# Altium PCB PCB2.PcbDoc (part 1 of 3)
Units mil, origin at the board's own origin, x right, y up, seen from the top; angles counter-clockwise.
Board outline 7874.02 x 7874.02 mil, 2 copper layers (Top Layer, Bottom Layer); 456 components, 298 nets, 1240 pads, 257 vias.
Unrouted connection lines stored in the file: 581.
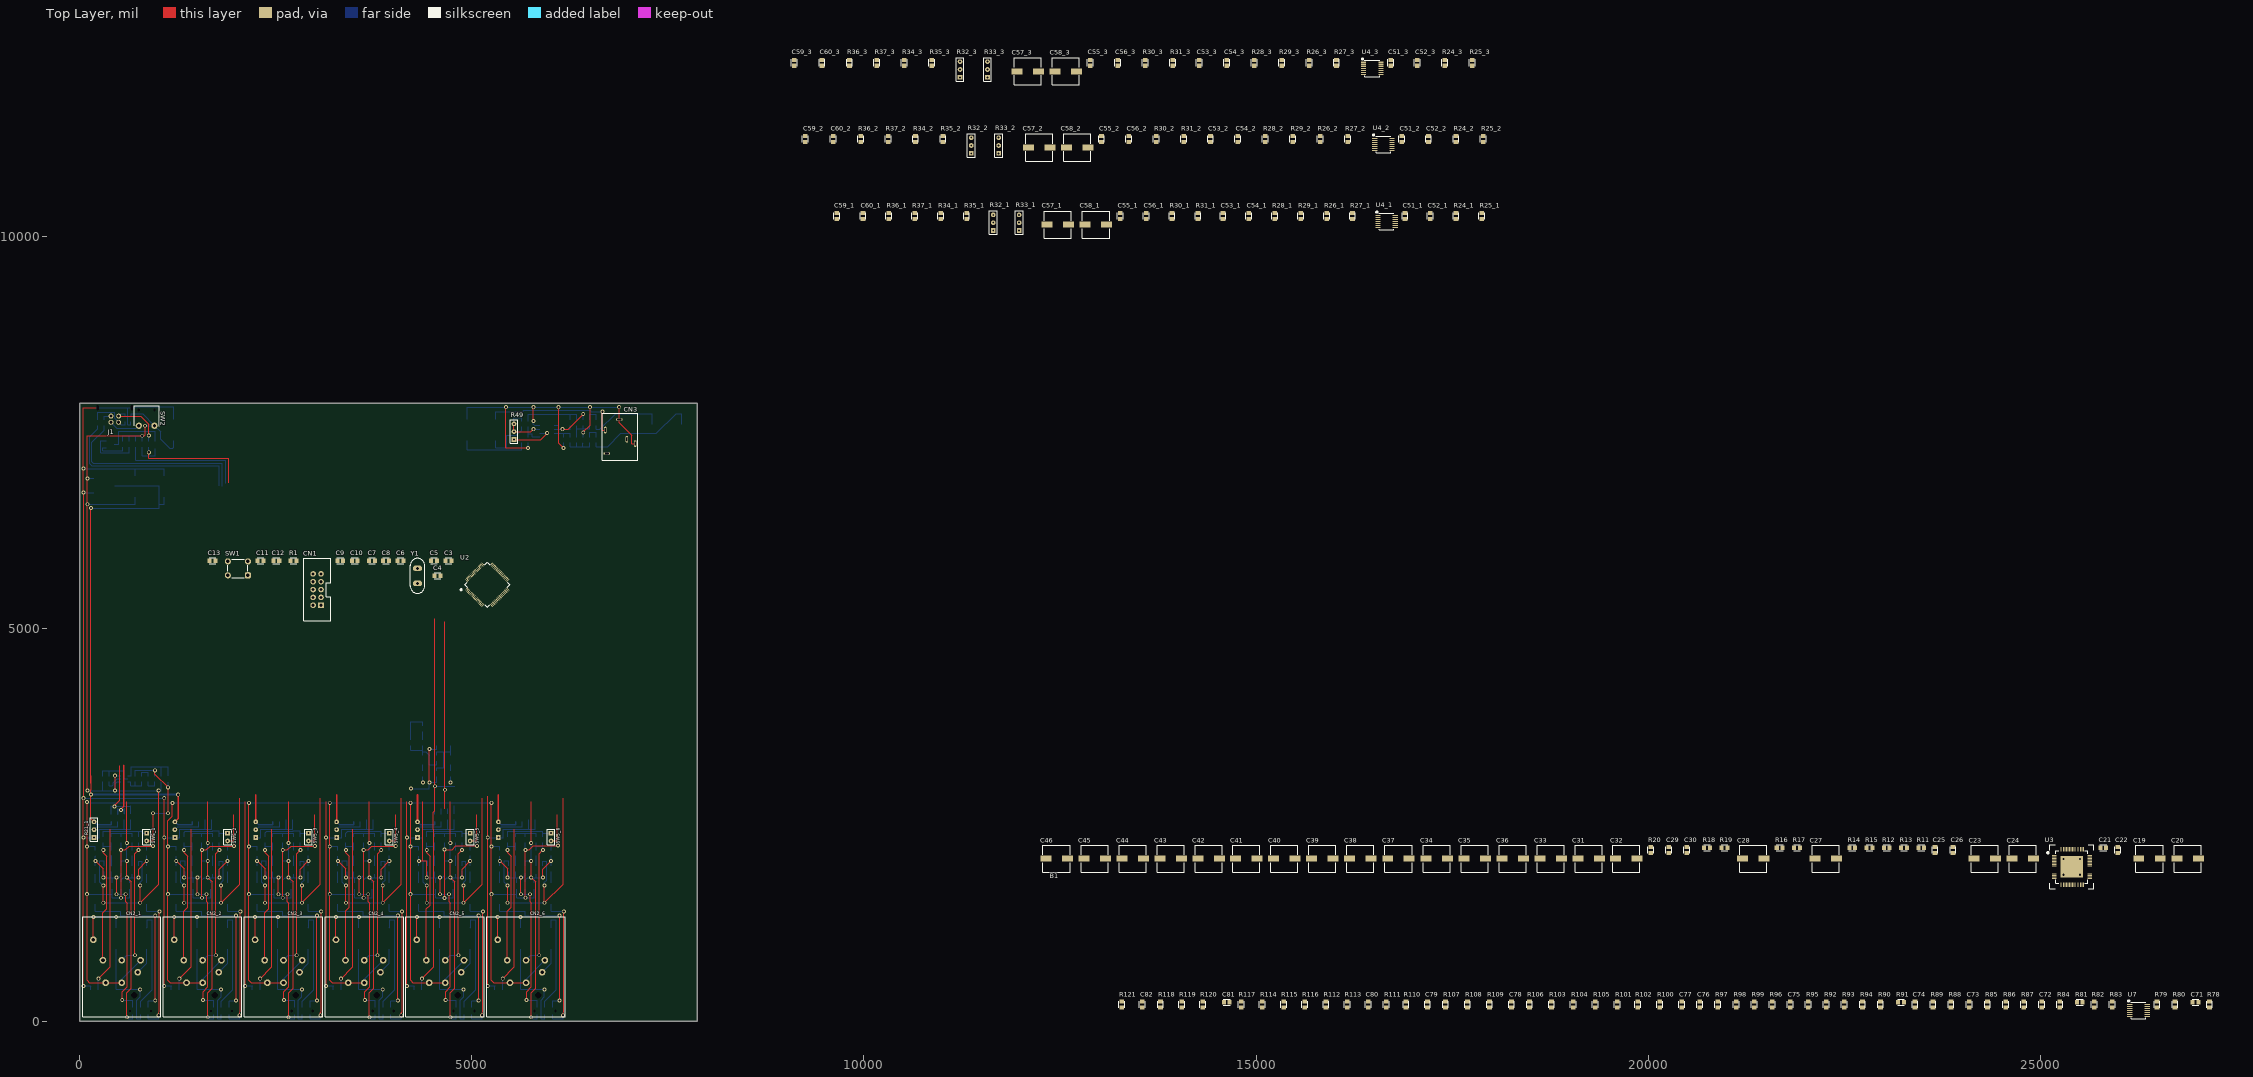
[diagram p0: Top Layer view]
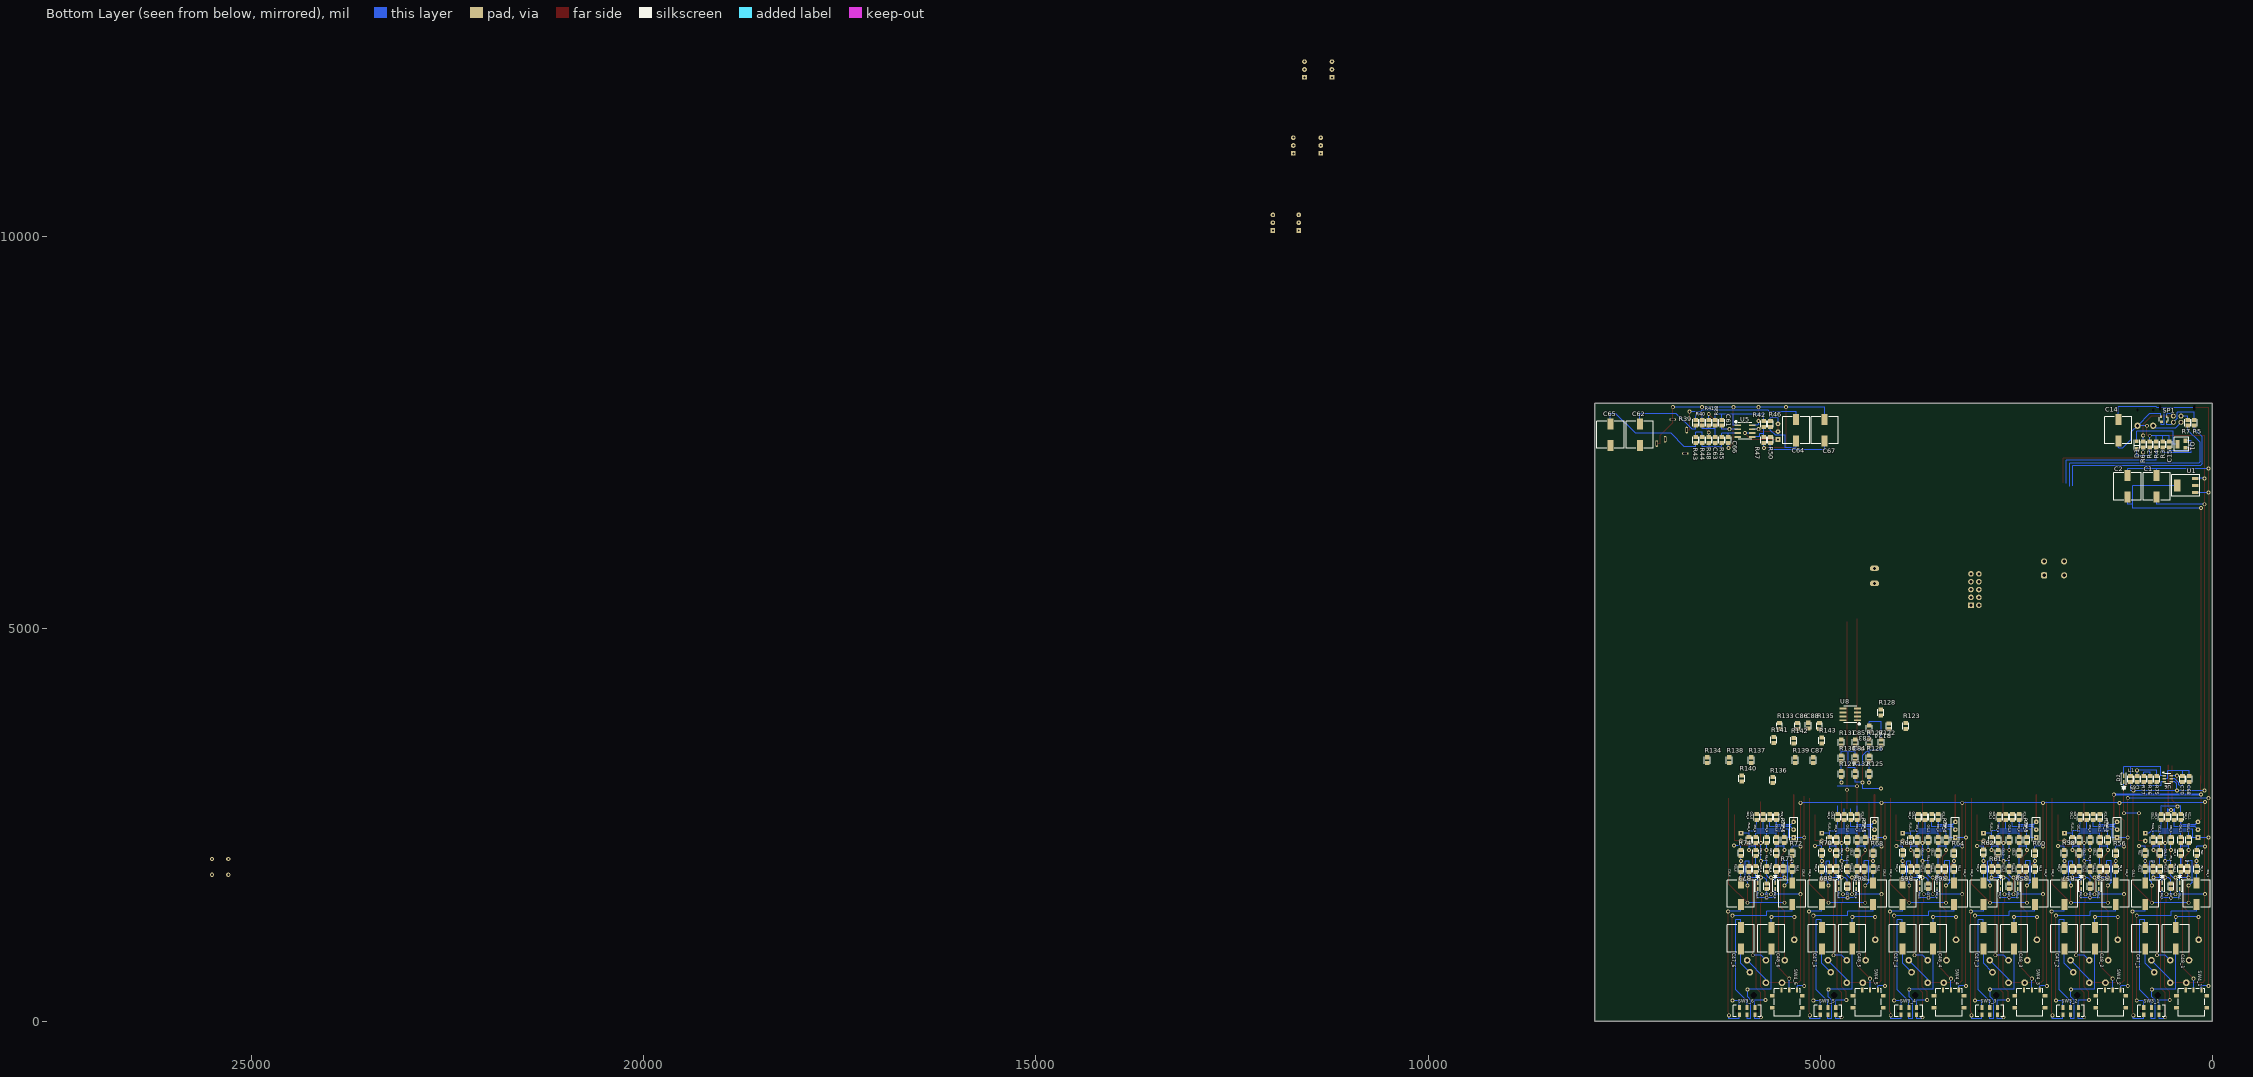
[diagram p1: Bottom Layer view, seen from below]

## Layer stack, top to bottom
Top Solder: solder mask 0.4, Solder Resist, Dk 3.5
Top Layer: signal copper 1.4
Dielectric 1: dielectric 12.6, FR-4, Dk 4.8
Bottom Layer: signal copper 1.4
Bottom Solder: solder mask 0.4, Solder Resist, Dk 3.5

## Board outline
0,0 0,7874.02 7874.02,7874.02 7874.02,0

## Design rules (kind name [scope] priority, off if disabled: settings)
Clearance [All] p1: gap=10 ignorepadtopadclearanceinfootprint=TRUE except(0: Arc-Hole Track-Hole SMDPad-Hole THPad-Hole Via-Hole Fill-Hole Poly-Hole Region-Hole Text-Hole)
PolygonConnect [All] p1: connectstyle=Relief reliefconductorwidth=10 reliefentries=4 polygonreliefangle="90 Angle" airgapwidth=10
RoomDefinition U_phantom_power_enabler_3 [InComponentClass('U_phantom_power_enabler_3')] p1: confinementstyle=ConfineIn formatcopy=TRUE lockcomponents=FALSE outline 2315.45,1636.32 3115.16,1636.32 3115.16,2689.47 2315.45,2689.47
RoomDefinition U_phantom_power_enabler_2 [InComponentClass('U_phantom_power_enabler_2')] p2: confinementstyle=ConfineIn formatcopy=TRUE lockcomponents=FALSE outline 1284.45,1636.32 2084.15,1636.32 2084.15,2689.47 1284.45,2689.47
RoomDefinition U_input_output_2 [InComponentClass('U_input_output_2')] p3: confinementstyle=ConfineIn formatcopy=TRUE lockcomponents=FALSE outline 1060.53,19.68 2084.15,19.68 2084.15,2677.17 1060.53,2677.17
RoomDefinition U_phantom_power_enabler_6 [InComponentClass('U_phantom_power_enabler_6')] p4: confinementstyle=ConfineIn formatcopy=TRUE lockcomponents=FALSE outline 5408.46,1636.32 6208.17,1636.32 6208.17,2689.47 5408.46,2689.47
RoomDefinition U_phantom_power_enabler_5 [InComponentClass('U_phantom_power_enabler_5')] p5: confinementstyle=ConfineIn formatcopy=TRUE lockcomponents=FALSE outline 4377.46,1636.32 5177.17,1636.32 5177.17,2689.47 4377.46,2689.47
RoomDefinition U_phantom_power_enabler_4 [InComponentClass('U_phantom_power_enabler_4')] p6: confinementstyle=ConfineIn formatcopy=TRUE lockcomponents=FALSE outline 3346.46,1636.32 4146.16,1636.32 4146.16,2689.47 3346.46,2689.47
RoomDefinition U_input_output_6 [InComponentClass('U_input_output_6')] p7: confinementstyle=ConfineIn formatcopy=TRUE lockcomponents=FALSE outline 5184.55,19.68 6208.17,19.68 6208.17,2677.17 5184.55,2677.17
RoomDefinition U_input_output_5 [InComponentClass('U_input_output_5')] p8: confinementstyle=ConfineIn formatcopy=TRUE lockcomponents=FALSE outline 4153.54,19.68 5177.17,19.68 5177.17,2677.17 4153.54,2677.17
RoomDefinition U_input_output_4 [InComponentClass('U_input_output_4')] p9: confinementstyle=ConfineIn formatcopy=TRUE lockcomponents=FALSE outline 3122.54,19.68 4146.16,19.68 4146.16,2677.17 3122.54,2677.17
RoomDefinition U_input_output_3 [InComponentClass('U_input_output_3')] p10: confinementstyle=ConfineIn formatcopy=TRUE lockcomponents=FALSE outline 2091.54,19.68 3115.16,19.68 3115.16,2677.17 2091.54,2677.17
RoomDefinition U_att_17db_6 [InComponentClass('U_att_17db_6')] p11: confinementstyle=ConfineIn formatcopy=TRUE lockcomponents=FALSE outline 5179.63,1407.48 6198.33,1407.48 6198.33,2022.64 5179.63,2022.64
RoomDefinition U_att_17db_5 [InComponentClass('U_att_17db_5')] p12: confinementstyle=ConfineIn formatcopy=TRUE lockcomponents=FALSE outline 4148.62,1407.48 5167.32,1407.48 5167.32,2022.64 4148.62,2022.64
RoomDefinition U_att_17db_4 [InComponentClass('U_att_17db_4')] p13: confinementstyle=ConfineIn formatcopy=TRUE lockcomponents=FALSE outline 3117.62,1407.48 4136.32,1407.48 4136.32,2022.64 3117.62,2022.64
RoomDefinition U_att_17db_3 [InComponentClass('U_att_17db_3')] p14: confinementstyle=ConfineIn formatcopy=TRUE lockcomponents=FALSE outline 2086.61,1407.48 3105.32,1407.48 3105.32,2022.64 2086.61,2022.64
RoomDefinition U_att_17db_2 [InComponentClass('U_att_17db_2')] p15: confinementstyle=ConfineIn formatcopy=TRUE lockcomponents=FALSE outline 1055.61,1407.48 2074.31,1407.48 2074.31,2022.64 1055.61,2022.64
RoomDefinition U_input [InComponentClass('U_input')] p16: confinementstyle=ConfineIn formatcopy=TRUE lockcomponents=FALSE outline 147.64,1441.93 6254.92,1441.93 6254.92,2236.71 147.64,2236.71
RoomDefinition U_usb_2_0 [InComponentClass('U_usb_2_0')] p17: confinementstyle=ConfineIn formatcopy=TRUE lockcomponents=FALSE outline 19.68,7261.32 1377.95,7261.32 1377.95,7854.33 19.68,7854.33
RoomDefinition U_stm32 [InComponentClass('U_stm32')] p18: confinementstyle=ConfineIn formatcopy=TRUE lockcomponents=FALSE outline 1618.56,5091.77 5563.56,5091.77 5563.56,6011.77 1618.56,6011.77
RoomDefinition U_preamp_3 [InComponentClass('U_preamp_3')] p19: confinementstyle=ConfineIn formatcopy=TRUE lockcomponents=FALSE outline 9065.91,11922.52 18025.91,11922.52 18025.91,12402.52 9065.91,12402.52
RoomDefinition U_preamp_2 [InComponentClass('U_preamp_2')] p20: confinementstyle=ConfineIn formatcopy=TRUE lockcomponents=FALSE outline 9208.62,10953.03 18168.62,10953.03 18168.62,11433.03 9208.62,11433.03
RoomDefinition U_preamp_1 [InComponentClass('U_preamp_1')] p21: confinementstyle=ConfineIn formatcopy=TRUE lockcomponents=FALSE outline 9608.94,9968.78 18128.94,9968.78 18128.94,10448.78 9608.94,10448.78
RoomDefinition U_phantom_power_enabler_1 [InComponentClass('U_phantom_power_enabler_1')] p22: confinementstyle=ConfineIn formatcopy=TRUE lockcomponents=FALSE outline 253.44,1636.32 1053.15,1636.32 1053.15,2689.47 253.44,2689.47
RoomDefinition U_phantom_power [InComponentClass('U_phantom_power')] p23: confinementstyle=ConfineIn formatcopy=TRUE lockcomponents=FALSE outline 66.44,2810.57 1390.26,2810.57 1390.26,3294.69 66.44,3294.69
RoomDefinition U_output_jack [InComponentClass('U_output_jack')] p24: confinementstyle=ConfineIn formatcopy=TRUE lockcomponents=FALSE outline 4768.7,7140.75 7854.33,7140.75 7854.33,7854.33 4768.7,7854.33
RoomDefinition U_input_output_1 [InComponentClass('U_input_output_1')] p25: confinementstyle=ConfineIn formatcopy=TRUE lockcomponents=FALSE outline 29.53,19.68 1053.15,19.68 1053.15,2677.17 29.53,2677.17
RoomDefinition U_fuente [InComponentClass('U_fuente')] p26: confinementstyle=ConfineIn formatcopy=TRUE lockcomponents=FALSE outline 155.02,6606.79 1262.3,6606.79 1262.3,7025.1 155.02,7025.1
RoomDefinition U_codec [InComponentClass('U_codec')] p27: confinementstyle=ConfineIn formatcopy=TRUE lockcomponents=FALSE outline 12230.83,1675.61 27100.83,1675.61 27100.83,2355.61 12230.83,2355.61
RoomDefinition U_bal2un_2 [InComponentClass('U_bal2un_2')] p28: confinementstyle=ConfineIn formatcopy=TRUE lockcomponents=FALSE outline 3618.66,2944.39 6719.65,2944.39 6719.65,4303.44 3618.66,4303.44
RoomDefinition U_bal2un_1 [InComponentClass('U_bal2un_1')] p29: confinementstyle=ConfineIn formatcopy=TRUE lockcomponents=FALSE outline 13240.89,22.11 27305.89,22.11 27305.89,387.11 13240.89,387.11
RoomDefinition U_att_17db_1 [InComponentClass('U_att_17db_1')] p30: confinementstyle=ConfineIn formatcopy=TRUE lockcomponents=FALSE outline 24.61,1407.48 1043.31,1407.48 1043.31,2022.64 24.61,2022.64
RoutingVias [All] p1: holewidth=28 width=50 viastyle="Through Hole" minholewidth=28 minwidth=50 maxholewidth=28 maxwidth=50
SolderMaskExpansion [All] p1: expansion=4
UnRoutedNet [All] p1: checkbadconnections=TRUE
Width [All] p1: maxlimit=100 minlimit=5 preferedwidth=10
29 further rules are at their usual default settings.

## Classes and differential pairs
channel class preamp: U_preamp_1 U_preamp_2 U_preamp_3
channel class phantom_power_enabler: U_phantom_power_enabler_1 U_phantom_power_enabler_2 U_phantom_power_enabler_3 U_phantom_power_enabler_4 U_phantom_power_enabler_5 U_phantom_power_enabler_6
channel class input_output: U_input_output_1 U_input_output_2 U_input_output_3 U_input_output_4 U_input_output_5 U_input_output_6
channel class att_17db: U_att_17db_1 U_att_17db_2 U_att_17db_3 U_att_17db_4 U_att_17db_5 U_att_17db_6
component class U_usb_2_0: C14 C15 D1 J1 Q1 R2 R3 R4 R5 R6 R7 SP1 SW2
component class U_stm32: C3 C4 C5 C6 C7 C8 C9 C10 C11 C12 C13 CN1 R1 SW1 U2 Y1
component class U_preamp_3: C51_3 C52_3 C53_3 C54_3 C55_3 C56_3 C57_3 C58_3 C59_3 C60_3 R24_3 R25_3 R26_3 R27_3 R28_3 R29_3 R30_3 R31_3 R32_3 R33_3 R34_3 R35_3 R36_3 R37_3 U4_3
component class U_preamp_2: C51_2 C52_2 C53_2 C54_2 C55_2 C56_2 C57_2 C58_2 C59_2 C60_2 R24_2 R25_2 R26_2 R27_2 R28_2 R29_2 R30_2 R31_2 R32_2 R33_2 R34_2 R35_2 R36_2 R37_2 U4_2
component class U_preamp_1: C51_1 C52_1 C53_1 C54_1 C55_1 C56_1 C57_1 C58_1 C59_1 C60_1 R24_1 R25_1 R26_1 R27_1 R28_1 R29_1 R30_1 R31_1 R32_1 R33_1 R34_1 R35_1 R36_1 R37_1 U4_1
component class U_phantom_power: C68 C69 C70 D2 L1 R75 R76 R77 U6
component class U_phantom_power_enabler_6: C89_6 C90_6 C91_6 C92_6 C93_6 D3_6 D4_6 R144_6 R145_6 R146_6 R147_6 SW5_6
component class U_phantom_power_enabler_5: C89_5 C90_5 C91_5 C92_5 C93_5 D3_5 D4_5 R144_5 R145_5 R146_5 R147_5 SW5_5
component class U_phantom_power_enabler_4: C89_4 C90_4 C91_4 C92_4 C93_4 D3_4 D4_4 R144_4 R145_4 R146_4 R147_4 SW5_4
component class U_phantom_power_enabler_3: C89_3 C90_3 C91_3 C92_3 C93_3 D3_3 D4_3 R144_3 R145_3 R146_3 R147_3 SW5_3
component class U_phantom_power_enabler_2: C89_2 C90_2 C91_2 C92_2 C93_2 D3_2 D4_2 R144_2 R145_2 R146_2 R147_2 SW5_2
component class U_phantom_power_enabler_1: C89_1 C90_1 C91_1 C92_1 C93_1 D3_1 D4_1 R144_1 R145_1 R146_1 R147_1 SW5_1
component class U_output_jack: C61 C62 C63 C64 C65 C66 C67 CN3 R38 R39 R40 R41 R42 R43 R44 R45 R46 R47 R48 R49 R50 U5
component class U_input: R51 R52 R53 R54 R55 R56 R57 R58 R59 R60 R61 R62 R63 R64 R65 R66 R67 R68 R69 R70 R71 R72 R73 R74
component class U_input_output_6: C47_6 C48_6 C49_6 C50_6 CN2_6 R21_6 R22_6 R23_6 SW3_6 SW4_6
component class U_input_output_5: C47_5 C48_5 C49_5 C50_5 CN2_5 R21_5 R22_5 R23_5 SW3_5 SW4_5
component class U_input_output_4: C47_4 C48_4 C49_4 C50_4 CN2_4 R21_4 R22_4 R23_4 SW3_4 SW4_4
component class U_input_output_3: C47_3 C48_3 C49_3 C50_3 CN2_3 R21_3 R22_3 R23_3 SW3_3 SW4_3
component class U_input_output_2: C47_2 C48_2 C49_2 C50_2 CN2_2 R21_2 R22_2 R23_2 SW3_2 SW4_2
component class U_input_output_1: C47_1 C48_1 C49_1 C50_1 CN2_1 R21_1 R22_1 R23_1 SW3_1 SW4_1
component class U_fuente: C1 C2 U1
component class U_codec: B1 C19 C20 C21 C22 C23 C24 C25 C26 C27 C28 C29 C30 C31 C32 C33 C34 C35 C36 C37 C38 C39 C40 C41 C42 C43 C44 C45 C46 R11 R12 R13 R14 R15 R16 R17 R18 R19 R20 U3
component class U_bal2un_2: C83 C84 C85 C86 C87 C88 R122 R123 R124 R125 R126 R127 R128 R129 R130 R131 R132 R133 R134 R135 R136 R137 R138 R139 R140 R141 R142 R143 U8
component class U_bal2un_1: C71 C72 C73 C74 C75 C76 C77 C78 C79 C80 C81 C82 R78 R79 R80 R81 R82 R83 R84 R85 R86 R87 R88 R89 R90 R91 R92 R93 R94 R95 R96 R97 R98 R99 R100 R101 R102 R103 R104 R105 R106 R107 R108 R109 R110 R111 R112 R113 R114 R115 R116 R117 R118 R119 R120 R121 U7
component class U_att_17db_6: C16_6 C17_6 C18_6 R8_6 R9_6 R10_6
component class U_att_17db_5: C16_5 C17_5 C18_5 R8_5 R9_5 R10_5
component class U_att_17db_4: C16_4 C17_4 C18_4 R8_4 R9_4 R10_4
component class U_att_17db_3: C16_3 C17_3 C18_3 R8_3 R9_3 R10_3
component class U_att_17db_2: C16_2 C17_2 C18_2 R8_2 R9_2 R10_2
component class U_att_17db_1: C16_1 C17_1 C18_1 R8_1 R9_1 R10_1

## Components (designator, comment, footprint, x,y, rotation, side; value= is the part's Value field where it differs from the comment)
B1 "GND_BIND" Track_8mil 12365.69,1783.46 r0 top
C1 "Capacitor polarizado" CAP_ELECTROLYTIC 711.12,6815.94 r90 bottom
C2 "Capacitor polarizado" CAP_ELECTROLYTIC 1082.67,6815.94 r90 bottom
C3 "Capacitor" C0805 4703.56,5866.77 r0 top
C4 "Capacitor" C0805 4564.47,5676.67 r0 top
C5 "Capacitor" C0805 4518.56,5866.77 r0 top
C6 "Capacitor" C0805 4093.56,5866.77 r0 top
C7 "Capacitor" C0805 3728.56,5866.77 r0 top
C8 "Capacitor" C0805 3908.56,5866.77 r0 top
C9 "Capacitor" C0805 3323.56,5866.77 r0 top
C10 "Capacitor" C0805 3508.56,5866.77 r0 top
C11 "Capacitor" C0805 2308.56,5866.77 r0 top
C12 "Capacitor" C0805 2508.56,5866.77 r0 top
C13 "Capacitor" C0805 1693.56,5866.77 r0 top
C14 "Capacitor polarizado" CAP_ELECTROLYTIC 1198.33,7534.45 r90 bottom
C15 "Capacitor" C0805 548.72,7352.36 r270 bottom
C16_1 "Capacitor polarizado" CAP_ELECTROLYTIC 201.77,1625.68 r270 bottom (schematic designator C16)
C16_2 "Capacitor polarizado" CAP_Electrolytic 1232.78,1625.68 r270 bottom (schematic designator C16)
C16_3 "Capacitor polarizado" CAP_Electrolytic 2263.78,1625.68 r270 bottom (schematic designator C16)
C16_4 "Capacitor polarizado" CAP_Electrolytic 3294.78,1625.68 r270 bottom (schematic designator C16)
C16_5 "Capacitor polarizado" CAP_Electrolytic 4325.79,1625.68 r270 bottom (schematic designator C16)
C16_6 "Capacitor polarizado" CAP_Electrolytic 5356.79,1625.68 r270 bottom (schematic designator C16)
C17_1 "Capacitor" C0805 529.04,1719.18 r90 bottom (schematic designator C17)
C17_2 "Capacitor" C0805 1560.04,1719.18 r90 bottom (schematic designator C17)
C17_3 "Capacitor" C0805 2591.04,1719.18 r90 bottom (schematic designator C17)
C17_4 "Capacitor" C0805 3622.05,1719.18 r90 bottom (schematic designator C17)
C17_5 "Capacitor" C0805 4653.05,1719.18 r90 bottom (schematic designator C17)
C17_6 "Capacitor" C0805 5684.06,1719.18 r90 bottom (schematic designator C17)
C18_1 "Capacitor polarizado" CAP_ELECTROLYTIC 856.3,1625.68 r270 bottom (schematic designator C18)
C18_2 "Capacitor polarizado" CAP_Electrolytic 1887.3,1625.68 r270 bottom (schematic designator C18)
C18_3 "Capacitor polarizado" CAP_Electrolytic 2918.31,1625.68 r270 bottom (schematic designator C18)
C18_4 "Capacitor polarizado" CAP_Electrolytic 3949.31,1625.68 r270 bottom (schematic designator C18)
C18_5 "Capacitor polarizado" CAP_Electrolytic 4980.31,1625.68 r270 bottom (schematic designator C18)
C18_6 "Capacitor polarizado" CAP_Electrolytic 6011.32,1625.68 r270 bottom (schematic designator C18)
C19 "Capacitor polarizado" CAP_ELECTROLYTIC 26390.83,2070.61 r0 top
C20 "Capacitor polarizado" CAP_ELECTROLYTIC 26875.83,2070.61 r0 top
C21 "Capacitor" C0805 25800.83,2210.61 r0 top
C22 "Capacitor" C0805 25985.83,2180.61 r90 top
C23 "Capacitor polarizado" CAP_ELECTROLYTIC 24290.83,2070.61 r0 top
C24 "Capacitor polarizado" CAP_ELECTROLYTIC 24775.83,2070.61 r0 top
C25 "Capacitor" C0805 23655.83,2180.61 r90 top
C26 "Capacitor" C0805 23885.83,2180.61 r90 top
C27 "Capacitor polarizado" CAP_ELECTROLYTIC 22265.83,2070.61 r0 top
C28 "Capacitor polarizado" CAP_ELECTROLYTIC 21340.83,2070.61 r0 top
C29 "Capacitor" C0805 20260.83,2180.61 r90 top
C30 "Capacitor" C0805 20490.83,2180.61 r90 top
C31 "Capacitor polarizado" CAP_ELECTROLYTIC 19240.83,2070.61 r0 top
C32 "Capacitor polarizado" CAP_ELECTROLYTIC 19720.83,2070.61 r0 top
C33 "Capacitor polarizado" CAP_ELECTROLYTIC 18755.83,2070.61 r0 top
C34 "Capacitor polarizado" CAP_ELECTROLYTIC 17300.83,2070.61 r0 top
C35 "Capacitor polarizado" CAP_ELECTROLYTIC 17785.83,2070.61 r0 top
C36 "Capacitor polarizado" CAP_ELECTROLYTIC 18270.83,2070.61 r0 top
C37 "Capacitor polarizado" CAP_ELECTROLYTIC 16815.83,2070.61 r0 top
C38 "Capacitor polarizado" CAP_ELECTROLYTIC 16330.83,2070.61 r0 top
C39 "Capacitor polarizado" CAP_ELECTROLYTIC 15845.83,2070.61 r0 top
C40 "Capacitor polarizado" CAP_ELECTROLYTIC 15360.83,2070.61 r0 top
C41 "Capacitor polarizado" CAP_ELECTROLYTIC 14875.83,2070.61 r0 top
C42 "Capacitor polarizado" CAP_ELECTROLYTIC 14395.83,2070.61 r0 top
C43 "Capacitor polarizado" CAP_ELECTROLYTIC 13910.83,2070.61 r0 top
C44 "Capacitor polarizado" CAP_ELECTROLYTIC 13425.83,2070.61 r0 top
C45 "Capacitor polarizado" CAP_ELECTROLYTIC 12940.83,2070.61 r0 top
C46 "Capacitor polarizado" CAP_ELECTROLYTIC 12455.83,2070.61 r0 top
C47_1 "Capacitor polarizado" CAP_ELECTROLYTIC 856.3,1053.15 r270 bottom (schematic designator C47)
C47_2 "Capacitor polarizado" CAP_Electrolytic 1887.3,1053.15 r270 bottom (schematic designator C47)
C47_3 "Capacitor polarizado" CAP_Electrolytic 2918.31,1053.15 r270 bottom (schematic designator C47)
C47_4 "Capacitor polarizado" CAP_Electrolytic 3949.31,1053.15 r270 bottom (schematic designator C47)
C47_5 "Capacitor polarizado" CAP_Electrolytic 4980.31,1053.15 r270 bottom (schematic designator C47)
C47_6 "Capacitor polarizado" CAP_Electrolytic 6011.32,1053.15 r270 bottom (schematic designator C47)
C48_1 "Capacitor polarizado" CAP_ELECTROLYTIC 467.52,1053.15 r90 bottom (schematic designator C48)
C48_2 "Capacitor polarizado" CAP_Electrolytic 1498.52,1053.15 r90 bottom (schematic designator C48)
C48_3 "Capacitor polarizado" CAP_Electrolytic 2529.53,1053.15 r90 bottom (schematic designator C48)
C48_4 "Capacitor polarizado" CAP_Electrolytic 3560.53,1053.15 r90 bottom (schematic designator C48)
C48_5 "Capacitor polarizado" CAP_Electrolytic 4591.54,1053.15 r90 bottom (schematic designator C48)
C48_6 "Capacitor polarizado" CAP_Electrolytic 5622.54,1053.15 r90 bottom (schematic designator C48)
C49_1 "Capacitor" C0805 570.87,2603.74 r270 bottom (schematic designator C49)
C49_2 "Capacitor" C0805 1601.87,2603.74 r270 bottom (schematic designator C49)
C49_3 "Capacitor" C0805 2632.87,2603.74 r270 bottom (schematic designator C49)
C49_4 "Capacitor" C0805 3663.88,2603.74 r270 bottom (schematic designator C49)
C49_5 "Capacitor" C0805 4694.88,2603.74 r270 bottom (schematic designator C49)
C49_6 "Capacitor" C0805 5725.89,2603.74 r270 bottom (schematic designator C49)
C50_1 "Capacitor" C0805 654.53,2603.74 r270 bottom (schematic designator C50)
C50_2 "Capacitor" C0805 1685.53,2603.74 r270 bottom (schematic designator C50)
C50_3 "Capacitor" C0805 2716.54,2603.74 r270 bottom (schematic designator C50)
C50_4 "Capacitor" C0805 3747.54,2603.74 r270 bottom (schematic designator C50)
C50_5 "Capacitor" C0805 4778.54,2603.74 r270 bottom (schematic designator C50)
C50_6 "Capacitor" C0805 5809.55,2603.74 r270 bottom (schematic designator C50)
C51_1 "Capacitor" C0805 16898.94,10263.78 r90 top (schematic designator C51)
C51_2 "Capacitor" C0805 16858.62,11248.03 r90 top (schematic designator C51)
C51_3 "Capacitor" C0805 16715.91,12217.52 r90 top (schematic designator C51)
C52_1 "Capacitor" C0805 17218.94,10263.78 r90 top (schematic designator C52)
C52_2 "Capacitor" C0805 17198.62,11248.03 r90 top (schematic designator C52)
C52_3 "Capacitor" C0805 17055.91,12217.52 r90 top (schematic designator C52)
C53_1 "Capacitor" C0805 14578.94,10263.78 r90 top (schematic designator C53)
C53_2 "Capacitor" C0805 14418.62,11248.03 r90 top (schematic designator C53)
C53_3 "Capacitor" C0805 14275.91,12217.52 r90 top (schematic designator C53)
C54_1 "Capacitor" C0805 14908.94,10263.78 r90 top (schematic designator C54)
C54_2 "Capacitor" C0805 14768.62,11248.03 r90 top (schematic designator C54)
C54_3 "Capacitor" C0805 14625.91,12217.52 r90 top (schematic designator C54)
C55_1 "Capacitor" C0805 13268.94,10263.78 r90 top (schematic designator C55)
C55_2 "Capacitor" C0805 13028.62,11248.03 r90 top (schematic designator C55)
C55_3 "Capacitor" C0805 12885.91,12217.52 r90 top (schematic designator C55)
C56_1 "Capacitor" C0805 13598.94,10263.78 r90 top (schematic designator C56)
C56_2 "Capacitor" C0805 13378.62,11248.03 r90 top (schematic designator C56)
C56_3 "Capacitor" C0805 13235.91,12217.52 r90 top (schematic designator C56)
C57_1 "Capacitor polarizado" CAP_ELECTROLYTIC 12473.94,10153.78 r0 top (schematic designator C57)
C57_2 "Capacitor polarizado" CAP_ELECTROLYTIC 12233.62,11138.03 r0 top (schematic designator C57)
C57_3 "Capacitor polarizado" CAP_ELECTROLYTIC 12090.91,12107.52 r0 top (schematic designator C57)
C58_1 "Capacitor polarizado" CAP_ELECTROLYTIC 12958.94,10153.78 r0 top (schematic designator C58)
C58_2 "Capacitor polarizado" CAP_ELECTROLYTIC 12718.62,11138.03 r0 top (schematic designator C58)
C58_3 "Capacitor polarizado" CAP_ELECTROLYTIC 12575.91,12107.52 r0 top (schematic designator C58)
C59_1 "Capacitor" C0805 9653.94,10263.78 r90 top (schematic designator C59)
C59_2 "Capacitor" C0805 9253.62,11248.03 r90 top (schematic designator C59)
C59_3 "Capacitor" C0805 9110.91,12217.52 r90 top (schematic designator C59)
C60_1 "Capacitor" C0805 9988.94,10263.78 r90 top (schematic designator C60)
C60_2 "Capacitor" C0805 9608.62,11248.03 r90 top (schematic designator C60)
C60_3 "Capacitor" C0805 9465.91,12217.52 r90 top (schematic designator C60)
C61 "Capacitor" C0805 6254.92,7627.95 r270 bottom
C62 "Capacitor polarizado" CAP_ELECTROLYTIC 7300.69,7475.39 r270 bottom
C63 "Capacitor" C0805 6338.58,7408.96 r270 bottom
C64 "Capacitor polarizado" CAP_ELECTROLYTIC 5307.58,7534.45 r90 bottom
C65 "Capacitor polarizado" CAP_ELECTROLYTIC 7674.71,7472.93 r270 bottom
C66 "Capacitor" C0805 6171.26,7408.96 r270 bottom
C67 "Capacitor polarizado" CAP_ELECTROLYTIC 4944.49,7534.45 r90 bottom
C68 "Capacitor" C0805 297.74,3087.21 r90 bottom
C69 "Capacitor" C0805 960.23,3086.74 r270 bottom
C70 "Capacitor" C0805 381.4,3087.21 r90 bottom
C71 "Capacitor" C0805 26975.89,242.11 r0 top
C72 "Capacitor" C0805 25015.89,212.11 r90 top
C73 "Capacitor" C0805 24090.89,212.11 r90 top
C74 "Capacitor" C0805 23400.89,212.11 r90 top
C75 "Capacitor" C0805 21810.89,212.11 r90 top
C76 "Capacitor" C0805 20655.89,212.11 r90 top
C77 "Capacitor" C0805 20425.89,212.11 r90 top
C78 "Capacitor" C0805 18255.89,212.11 r90 top
C79 "Capacitor" C0805 17185.89,212.11 r90 top
C80 "Capacitor" C0805 16430.89,212.11 r90 top
C81 "Capacitor" C0805 14625.89,242.11 r0 top
C82 "Capacitor" C0805 13550.89,212.11 r90 top
C83 "Capacitor" C0805 4376.91,3729.33 r270 bottom
C84 "Capacitor" C0805 4554.07,3350.39 r90 bottom
C85 "Capacitor" C0805 4554.07,3549.7 r270 bottom
C86 "Capacitor" C0805 5290.35,3764.27 r90 bottom
C87 "Capacitor" C0805 5090.49,3326.28 r90 bottom
C88 "Capacitor" C0805 5152.01,3766.24 r90 bottom
C89_1 "Capacitor" C0805 403.54,2142.91 r270 bottom (schematic designator C89)
C89_2 "Capacitor" C0805 1434.25,2142.91 r270 bottom (schematic designator C89)
C89_3 "Capacitor" C0805 2465.26,2142.91 r270 bottom (schematic designator C89)
C89_4 "Capacitor" C0805 3496.26,2142.91 r270 bottom (schematic designator C89)
C89_5 "Capacitor" C0805 4527.26,2142.91 r270 bottom (schematic designator C89)
C89_6 "Capacitor" C0805 5558.27,2142.91 r270 bottom (schematic designator C89)
C90_1 "Capacitor" C0805 403.54,2310.23 r90 bottom (schematic designator C90)
C90_2 "Capacitor" C0805 1434.25,2310.23 r90 bottom (schematic designator C90)
C90_3 "Capacitor" C0805 2465.26,2310.23 r90 bottom (schematic designator C90)
C90_4 "Capacitor" C0805 3496.26,2310.23 r90 bottom (schematic designator C90)
C90_5 "Capacitor" C0805 4527.26,2310.23 r90 bottom (schematic designator C90)
C90_6 "Capacitor" C0805 5558.27,2310.23 r90 bottom (schematic designator C90)
C91_1 "Capacitor" C0805 529.04,2310.23 r270 bottom (schematic designator C91)
C91_2 "Capacitor" C0805 1560.04,2310.23 r270 bottom (schematic designator C91)
C91_3 "Capacitor" C0805 2591.04,2310.23 r270 bottom (schematic designator C91)
C91_4 "Capacitor" C0805 3622.05,2310.23 r270 bottom (schematic designator C91)
C91_5 "Capacitor" C0805 4653.05,2310.23 r270 bottom (schematic designator C91)
C91_6 "Capacitor" C0805 5684.06,2310.23 r270 bottom (schematic designator C91)
C92_1 "Capacitor" C0805 669.29,2310.23 r270 bottom (schematic designator C92)
C92_2 "Capacitor" C0805 1700.3,2310.23 r270 bottom (schematic designator C92)
C92_3 "Capacitor" C0805 2731.3,2310.23 r270 bottom (schematic designator C92)
C92_4 "Capacitor" C0805 3762.3,2310.23 r270 bottom (schematic designator C92)
C92_5 "Capacitor" C0805 4793.31,2310.23 r270 bottom (schematic designator C92)
C92_6 "Capacitor" C0805 5824.31,2310.23 r270 bottom (schematic designator C92)
C93_1 "Capacitor" C0805 669.29,2142.91 r270 bottom (schematic designator C93)
C93_2 "Capacitor" C0805 1700.3,2142.91 r270 bottom (schematic designator C93)
C93_3 "Capacitor" C0805 2731.3,2142.91 r270 bottom (schematic designator C93)
C93_4 "Capacitor" C0805 3762.3,2142.91 r270 bottom (schematic designator C93)
C93_5 "Capacitor" C0805 4793.31,2142.91 r270 bottom (schematic designator C93)
C93_6 "Capacitor" C0805 5824.31,2142.91 r270 bottom (schematic designator C93)
CN1 "STLINK V2 Mini_2" IDC10M 3028.56,5501.77 r90 top
CN2_1 "XRL_Jack_Combo_stereo" "Combo XLR Jack" 537.8,52.28 r90 top (schematic designator CN2)
CN2_2 "XRL_Jack_Combo_stereo" "Combo XLR Jack" 1568.8,52.28 r90 top (schematic designator CN2)
CN2_3 "XRL_Jack_Combo_stereo" "Combo XLR Jack" 2599.8,52.28 r90 top (schematic designator CN2)
CN2_4 "XRL_Jack_Combo_stereo" "Combo XLR Jack" 3630.81,52.28 r90 top (schematic designator CN2)
CN2_5 "XRL_Jack_Combo_stereo" "Combo XLR Jack" 4661.81,52.28 r90 top (schematic designator CN2)
CN2_6 "XRL_Jack_Combo_stereo" "Combo XLR Jack" 5692.81,52.28 r90 top (schematic designator CN2)
CN3 "jack_3.5mm" "Jack 3.5mm" 6879.92,7748.52 r270 top
D1 "Led color" SMD_0805_Diodo 964.57,7394.19 r270 bottom
D2 "PMEG6010" SOD128 1129.43,3087.21 r90 bottom
D3_1 "PMEG6010" SOD128 418.31,1724.11 r270 bottom (schematic designator D3)
D3_2 "PMEG6010" SOD128 1449.31,1724.11 r270 bottom (schematic designator D3)
D3_3 "PMEG6010" SOD128 2480.32,1724.11 r270 bottom (schematic designator D3)
D3_4 "PMEG6010" SOD128 3511.32,1724.11 r270 bottom (schematic designator D3)
D3_5 "PMEG6010" SOD128 4542.32,1724.11 r270 bottom (schematic designator D3)
D3_6 "PMEG6010" SOD128 5573.33,1724.11 r270 bottom (schematic designator D3)
D4_1 "PMEG6010" SOD128 639.76,1724.11 r270 bottom (schematic designator D4)
D4_2 "PMEG6010" SOD128 1670.77,1724.11 r270 bottom (schematic designator D4)
D4_3 "PMEG6010" SOD128 2701.77,1724.11 r270 bottom (schematic designator D4)
D4_4 "PMEG6010" SOD128 3732.78,1724.11 r270 bottom (schematic designator D4)
D4_5 "PMEG6010" SOD128 4763.78,1724.11 r270 bottom (schematic designator D4)
D4_6 "PMEG6010" SOD128 5794.78,1724.11 r270 bottom (schematic designator D4)
J1 "Micro_USB" "USB Type B" 449.8,7727.17 r180 top
L1 "0.68nH" L0805 1043.89,3086.74 r90 bottom
Q1 "BC817" SOT23 393.7,7354.82 r90 bottom
R1 "Resistor" R0805 2728.56,5866.77 r0 top
R2 "Resistor" R0805 799.6,7353.05 r90 bottom
R3 "Resistor" R0805 632.38,7352.36 r90 bottom
R4 "Resistor" R0805 716.05,7353.05 r270 bottom
R5 "Resistor" R0805 231.3,7627.95 r270 bottom
R6 "Resistor" R0805 883.37,7352.36 r270 bottom
R7 "Resistor" R0805 314.96,7627.95 r270 bottom
R8_1 "Resistor" R0805 201.77,1940.64 r90 bottom (schematic designator R8)
R8_2 "Resistor" R0805 1232.78,1940.64 r90 bottom (schematic designator R8)
R8_3 "Resistor" R0805 2263.78,1940.64 r90 bottom (schematic designator R8)
R8_4 "Resistor" R0805 3294.78,1940.64 r90 bottom (schematic designator R8)
R8_5 "Resistor" R0805 4325.79,1940.64 r90 bottom (schematic designator R8)
R8_6 "Resistor" R0805 5356.79,1940.64 r90 bottom (schematic designator R8)
R9_1 "Resistor" R0805 529.04,1940.64 r270 bottom (schematic designator R9)
R9_2 "Resistor" R0805 1560.04,1940.64 r270 bottom (schematic designator R9)
R9_3 "Resistor" R0805 2591.04,1940.64 r270 bottom (schematic designator R9)
R9_4 "Resistor" R0805 3622.05,1940.64 r270 bottom (schematic designator R9)
R9_5 "Resistor" R0805 4653.05,1940.64 r270 bottom (schematic designator R9)
R9_6 "Resistor" R0805 5684.06,1940.64 r270 bottom (schematic designator R9)
R10_1 "Resistor" R0805 856.3,1940.64 r90 bottom (schematic designator R10)
R10_2 "Resistor" R0805 1887.3,1940.64 r90 bottom (schematic designator R10)
R10_3 "Resistor" R0805 2918.31,1940.64 r90 bottom (schematic designator R10)
R10_4 "Resistor" R0805 3949.31,1940.64 r90 bottom (schematic designator R10)
R10_5 "Resistor" R0805 4980.31,1940.64 r90 bottom (schematic designator R10)
R10_6 "Resistor" R0805 6011.32,1940.64 r90 bottom (schematic designator R10)
R11 "Resistor" R0805 23480.83,2210.61 r0 top
R12 "Resistor" R0805 23040.83,2210.61 r0 top
R13 "Resistor" R0805 23260.83,2210.61 r0 top
R14 "Resistor" R0805 22600.83,2210.61 r0 top
R15 "Resistor" R0805 22820.83,2210.61 r0 top
R16 "Resistor" R0805 21675.83,2210.61 r0 top
R17 "Resistor" R0805 21895.83,2210.61 r0 top
R18 "Resistor" R0805 20750.83,2210.61 r0 top
R19 "Resistor" R0805 20970.83,2210.61 r0 top
R20 "Resistor" R0805 20030.83,2180.61 r90 top
R21_1 "Potenciometro" "Header 3x1" 184.55,2340.06 r90 top (schematic designator R21)
R21_2 "Potenciometro" "Header 3x1" 1215.55,2340.06 r90 bottom (schematic designator R21)
R21_3 "Potenciometro" "Header 3x1" 2246.55,2340.06 r90 bottom (schematic designator R21)
R21_4 "Potenciometro" "Header 3x1" 3277.56,2340.06 r90 bottom (schematic designator R21)
R21_5 "Potenciometro" "Header 3x1" 4308.56,2340.06 r90 bottom (schematic designator R21)
R21_6 "Potenciometro" "Header 3x1" 5339.57,2340.06 r90 bottom (schematic designator R21)
R22_1 "Resistor" R0805 403.54,2602.46 r270 bottom (schematic designator R22)
R22_2 "Resistor" R0805 1434.25,2602.46 r270 bottom (schematic designator R22)
R22_3 "Resistor" R0805 2465.26,2602.46 r270 bottom (schematic designator R22)
R22_4 "Resistor" R0805 3496.26,2602.46 r270 bottom (schematic designator R22)
R22_5 "Resistor" R0805 4527.26,2602.46 r270 bottom (schematic designator R22)
R22_6 "Resistor" R0805 5558.27,2602.46 r270 bottom (schematic designator R22)
R23_1 "Resistor" R0805 487.2,2602.46 r90 bottom (schematic designator R23)
R23_2 "Resistor" R0805 1518.21,2602.46 r90 bottom (schematic designator R23)
R23_3 "Resistor" R0805 2549.21,2602.46 r90 bottom (schematic designator R23)
R23_4 "Resistor" R0805 3580.22,2602.46 r90 bottom (schematic designator R23)
R23_5 "Resistor" R0805 4611.22,2602.46 r90 bottom (schematic designator R23)
R23_6 "Resistor" R0805 5642.22,2602.46 r90 bottom (schematic designator R23)
R24_1 "Resistor" R0805 17548.94,10263.78 r90 top (schematic designator R24)
R24_2 "Resistor" R0805 17548.62,11248.03 r90 top (schematic designator R24)
R24_3 "Resistor" R0805 17405.91,12217.52 r90 top (schematic designator R24)
R25_1 "Resistor" R0805 17878.94,10263.78 r90 top (schematic designator R25)
R25_2 "Resistor" R0805 17898.62,11248.03 r90 top (schematic designator R25)
R25_3 "Resistor" R0805 17755.91,12217.52 r90 top (schematic designator R25)
R26_1 "Resistor" R0805 15898.94,10263.78 r90 top (schematic designator R26)
R26_2 "Resistor" R0805 15818.62,11248.03 r90 top (schematic designator R26)
R26_3 "Resistor" R0805 15675.91,12217.52 r90 top (schematic designator R26)
R27_1 "Resistor" R0805 16228.94,10263.78 r90 top (schematic designator R27)
R27_2 "Resistor" R0805 16168.62,11248.03 r90 top (schematic designator R27)
R27_3 "Resistor" R0805 16025.91,12217.52 r90 top (schematic designator R27)
R28_1 "Resistor" R0805 15238.94,10263.78 r90 top (schematic designator R28)
R28_2 "Resistor" R0805 15118.62,11248.03 r90 top (schematic designator R28)
R28_3 "Resistor" R0805 14975.91,12217.52 r90 top (schematic designator R28)
R29_1 "Resistor" R0805 15568.94,10263.78 r90 top (schematic designator R29)
R29_2 "Resistor" R0805 15468.62,11248.03 r90 top (schematic designator R29)
R29_3 "Resistor" R0805 15325.91,12217.52 r90 top (schematic designator R29)
R30_1 "Resistor" R0805 13928.94,10263.78 r90 top (schematic designator R30)
R30_2 "Resistor" R0805 13728.62,11248.03 r90 top (schematic designator R30)
R30_3 "Resistor" R0805 13585.91,12217.52 r90 top (schematic designator R30)
R31_1 "Resistor" R0805 14258.94,10263.78 r90 top (schematic designator R31)
R31_2 "Resistor" R0805 14078.62,11248.03 r90 top (schematic designator R31)
R31_3 "Resistor" R0805 13935.91,12217.52 r90 top (schematic designator R31)
R32_1 "Potenciometro" "Header 3x1" 11648.94,10078.78 r90 top (schematic designator R32)
R32_2 "Potenciometro" "Header 3x1" 11368.62,11063.03 r90 top (schematic designator R32)
R32_3 "Potenciometro" "Header 3x1" 11225.91,12032.52 r90 top (schematic designator R32)
R33_1 "Potenciometro" "Header 3x1" 11978.94,10078.78 r90 top (schematic designator R33)
R33_2 "Potenciometro" "Header 3x1" 11718.62,11063.03 r90 top (schematic designator R33)
R33_3 "Potenciometro" "Header 3x1" 11575.91,12032.52 r90 top (schematic designator R33)
R34_1 "Resistor" R0805 10978.94,10263.78 r90 top (schematic designator R34)
R34_2 "Resistor" R0805 10658.62,11248.03 r90 top (schematic designator R34)
R34_3 "Resistor" R0805 10515.91,12217.52 r90 top (schematic designator R34)
R35_1 "Resistor" R0805 11308.94,10263.78 r90 top (schematic designator R35)
R35_2 "Resistor" R0805 11008.62,11248.03 r90 top (schematic designator R35)
R35_3 "Resistor" R0805 10865.91,12217.52 r90 top (schematic designator R35)
R36_1 "Resistor" R0805 10318.94,10263.78 r90 top (schematic designator R36)
R36_2 "Resistor" R0805 9958.62,11248.03 r90 top (schematic designator R36)
R36_3 "Resistor" R0805 9815.91,12217.52 r90 top (schematic designator R36)
R37_1 "Resistor" R0805 10648.94,10263.78 r90 top (schematic designator R37)
R37_2 "Resistor" R0805 10308.62,11248.03 r90 top (schematic designator R37)
R37_3 "Resistor" R0805 10165.91,12217.52 r90 top (schematic designator R37)
R38 "Resistor" R0805 6338.58,7627.95 r90 bottom
R39 "Resistor" R0805 6589.57,7627.95 r90 bottom
R40 "Resistor" R0805 6505.91,7627.95 r270 bottom
R41 "Resistor" R0805 6422.24,7627.95 r90 bottom
R42 "Resistor" R0805 5718.51,7613.19 r270 bottom
R43 "Resistor" R0805 6589.57,7408.96 r90 bottom
R44 "Resistor" R0805 6505.91,7408.96 r270 bottom
R45 "Resistor" R0805 6254.92,7408.96 r90 bottom
R46 "Resistor" R0805 5634.84,7613.19 r270 bottom
R47 "Resistor" R0805 5718.51,7408.96 r90 bottom
R48 "Resistor" R0805 6422.24,7408.96 r270 bottom
R49 "Potenciometro" "Header 3x1" 5538.88,7414.76 r90 top
R50 "Resistor" R0805 5634.84,7408.96 r90 bottom
R51 "Resistor" R0805 317.42,1940.64 r270 bottom
R52 "Resistor" R0805 201.77,2142.91 r90 bottom
R53 "Resistor" R0805 752.95,1940.64 r270 bottom
R54 "Resistor" R0805 856.3,2142.91 r90 bottom
R55 "Resistor" R0805 1348.43,1940.64 r270 bottom
R56 "Resistor" R0805 1232.78,2140.44 r90 bottom
R57 "Resistor" R0805 1783.96,1940.64 r270 bottom
R58 "Resistor" R0805 1887.3,2142.91 r90 bottom
R59 "Resistor" R0805 2379.43,1940.64 r270 bottom
R60 "Resistor" R0805 2263.78,2140.44 r90 bottom
R61 "Resistor" R0805 2814.96,1940.64 r270 bottom
R62 "Resistor" R0805 2918.31,2148.13 r90 bottom
R63 "Resistor" R0805 3410.43,1940.64 r270 bottom
R64 "Resistor" R0805 3294.78,2140.44 r90 bottom
R65 "Resistor" R0805 3845.96,1940.64 r270 bottom
R66 "Resistor" R0805 3949.31,2145.67 r90 bottom
R67 "Resistor" R0805 4441.44,1940.64 r270 bottom
R68 "Resistor" R0805 4325.79,2140.44 r90 bottom
R69 "Resistor" R0805 4876.97,1940.64 r270 bottom
R70 "Resistor" R0805 4980.31,2142.91 r90 bottom
R71 "Resistor" R0805 5472.44,1941.44 r270 bottom
R72 "Resistor" R0805 5356.79,2140.44 r90 bottom
R73 "Resistor" R0805 5907.97,1940.64 r270 bottom
R74 "Resistor" R0805 6011.32,2142.91 r90 bottom
R75 "Resistor" R0805 708.8,3087.21 r90 bottom
R76 "Resistor" R0805 792.32,3087.21 r270 bottom
R77 "Resistor" R0805 875.98,3087.21 r90 bottom
R78 "Resistor" R0805 27155.89,212.11 r90 top
R79 "Resistor" R0805 26485.89,212.11 r90 top
R80 "Resistor" R0805 26715.89,212.11 r90 top
R81 "Resistor" R0805 25500.89,242.11 r0 top
R82 "Resistor" R0805 25685.89,212.11 r90 top
R83 "Resistor" R0805 25915.89,212.11 r90 top
R84 "Resistor" R0805 25245.89,212.11 r90 top
R85 "Resistor" R0805 24325.89,212.11 r90 top
R86 "Resistor" R0805 24555.89,212.11 r90 top
R87 "Resistor" R0805 24785.89,212.11 r90 top
R88 "Resistor" R0805 23860.89,212.11 r90 top
R89 "Resistor" R0805 23630.89,212.11 r90 top
R90 "Resistor" R0805 22960.89,212.11 r90 top
R91 "Resistor" R0805 23220.89,242.11 r0 top
R92 "Resistor" R0805 22270.89,212.11 r90 top
R93 "Resistor" R0805 22500.89,212.11 r90 top
R94 "Resistor" R0805 22730.89,212.11 r90 top
R95 "Resistor" R0805 22040.89,212.11 r90 top
R96 "Resistor" R0805 21580.89,212.11 r90 top
R97 "Resistor" R0805 20885.89,212.11 r90 top
R98 "Resistor" R0805 21120.89,212.11 r90 top
R99 "Resistor" R0805 21350.89,212.11 r90 top
R100 "Resistor" R0805 20145.89,212.11 r90 top
R101 "Resistor" R0805 19605.89,212.11 r90 top
R102 "Resistor" R0805 19865.89,212.11 r90 top
R103 "Resistor" R0805 18765.89,212.11 r90 top
R104 "Resistor" R0805 19045.89,212.11 r90 top
R105 "Resistor" R0805 19325.89,212.11 r90 top
R106 "Resistor" R0805 18485.89,212.11 r90 top
R107 "Resistor" R0805 17415.89,212.11 r90 top
R108 "Resistor" R0805 17695.89,212.11 r90 top
R109 "Resistor" R0805 17975.89,212.11 r90 top
R110 "Resistor" R0805 16910.89,212.11 r90 top
R111 "Resistor" R0805 16660.89,212.11 r90 top
R112 "Resistor" R0805 15890.89,212.11 r90 top
R113 "Resistor" R0805 16160.89,212.11 r90 top
R114 "Resistor" R0805 15080.89,212.11 r90 top
R115 "Resistor" R0805 15350.89,212.11 r90 top
R116 "Resistor" R0805 15620.89,212.11 r90 top
R117 "Resistor" R0805 14810.89,212.11 r90 top
R118 "Resistor" R0805 13780.89,212.11 r90 top
R119 "Resistor" R0805 14050.89,212.11 r90 top
R120 "Resistor" R0805 14320.89,212.11 r90 top
R121 "Resistor" R0805 13285.89,212.11 r90 top
R122 "Resistor" R0805 4224.76,3549.7 r90 bottom
R123 "Resistor" R0805 3911.85,3763.78 r90 bottom
R124 "Resistor" R0805 4123.46,3758.86 r270 bottom
R125 "Resistor" R0805 4376.91,3151.08 r90 bottom
R126 "Resistor" R0805 4376.91,3350.39 r90 bottom
R127 "Resistor" R0805 4376.91,3549.7 r90 bottom
R128 "Resistor" R0805 4226.81,3936.02 r90 bottom
R129 "Resistor" R0805 4731.24,3151.08 r90 bottom
R130 "Resistor" R0805 4731.24,3350.39 r90 bottom
R131 "Resistor" R0805 4731.24,3549.7 r90 bottom
R132 "Resistor" R0805 4554.07,3151.08 r90 bottom
R133 "Resistor" R0805 5520.35,3764.27 r90 bottom
R134 "Resistor" R0805 6440.49,3326.28 r90 bottom
R135 "Resistor" R0805 5010.35,3764.27 r90 bottom
R136 "Resistor" R0805 5608.05,3072.34 r90 bottom
R137 "Resistor" R0805 5880.49,3326.28 r90 bottom
R138 "Resistor" R0805 6160.49,3326.28 r90 bottom
R139 "Resistor" R0805 5320.49,3326.28 r90 bottom
R140 "Resistor" R0805 5999.29,3092.03 r90 bottom
R141 "Resistor" R0805 5592.46,3584.15 r90 bottom
R142 "Resistor" R0805 5339.02,3574.31 r90 bottom
R143 "Resistor" R0805 4982.22,3579.23 r90 bottom
R144_1 "Resistor" R0805 403.54,1940.64 r90 bottom (schematic designator R144)
R144_2 "Resistor" R0805 1434.25,1940.64 r90 bottom (schematic designator R144)
R144_3 "Resistor" R0805 2465.26,1940.64 r90 bottom (schematic designator R144)
R144_4 "Resistor" R0805 3496.26,1940.64 r90 bottom (schematic designator R144)
R144_5 "Resistor" R0805 4527.26,1940.64 r90 bottom (schematic designator R144)
R144_6 "Resistor" R0805 5558.27,1940.64 r90 bottom (schematic designator R144)
R145_1 "Resistor" R0805 302.66,2310.23 r270 bottom (schematic designator R145)
R145_2 "Resistor" R0805 1333.66,2310.23 r270 bottom (schematic designator R145)
R145_3 "Resistor" R0805 2364.67,2310.23 r270 bottom (schematic designator R145)
R145_4 "Resistor" R0805 3395.67,2310.23 r270 bottom (schematic designator R145)
R145_5 "Resistor" R0805 4426.67,2310.23 r270 bottom (schematic designator R145)
R145_6 "Resistor" R0805 5457.68,2310.23 r270 bottom (schematic designator R145)
R146_1 "Resistor" R0805 752.95,2310.23 r90 bottom (schematic designator R146)
R146_2 "Resistor" R0805 1783.96,2310.23 r90 bottom (schematic designator R146)
R146_3 "Resistor" R0805 2814.96,2310.23 r90 bottom (schematic designator R146)
R146_4 "Resistor" R0805 3845.96,2310.23 r90 bottom (schematic designator R146)
R146_5 "Resistor" R0805 4876.97,2310.23 r90 bottom (schematic designator R146)
R146_6 "Resistor" R0805 5907.97,2310.23 r90 bottom (schematic designator R146)
R147_1 "Resistor" R0805 669.29,1940.64 r90 bottom (schematic designator R147)
R147_2 "Resistor" R0805 1700.3,1940.64 r90 bottom (schematic designator R147)
R147_3 "Resistor" R0805 2731.3,1940.64 r90 bottom (schematic designator R147)
R147_4 "Resistor" R0805 3762.3,1940.64 r90 bottom (schematic designator R147)
R147_5 "Resistor" R0805 4793.31,1940.64 r90 bottom (schematic designator R147)
R147_6 "Resistor" R0805 5824.31,1940.64 r90 bottom (schematic designator R147)
SP1 "PRTR5V0U2X" SOT143B 620.08,7672.24 r180 bottom
SW1 "TAC_SWITCH_4" TAC_SW_4 2018.56,5771.77 r0 top
SW2 "OnOff_SW_SPST" SPST_TH_SW_Button_90º 855.41,7690.35 r180 top
SW3_1 "Slide_SW_DPDT" DPDT_SMD_SLIDE_90º 777.56,127.95 r180 bottom (schematic designator SW3)
SW3_2 "Slide_SW_DPDT" DPDT_SMD_Slide_90º 1808.56,127.95 r180 bottom (schematic designator SW3)
SW3_3 "Slide_SW_DPDT" DPDT_SMD_Slide_90º 2839.57,127.95 r180 bottom (schematic designator SW3)
SW3_4 "Slide_SW_DPDT" DPDT_SMD_Slide_90º 3870.57,127.95 r180 bottom (schematic designator SW3)
SW3_5 "Slide_SW_DPDT" DPDT_SMD_Slide_90º 4901.57,127.95 r180 bottom (schematic designator SW3)
SW3_6 "Slide_SW_DPDT" DPDT_SMD_Slide_90º 5932.58,127.95 r180 bottom (schematic designator SW3)
SW4_1 "TAC_SWITCH_4" SPDT_SMD_90º 265.75,246.06 r90 bottom (schematic designator SW4)
SW4_2 "TAC_SWITCH_4" SPDT_SMD_90º 1296.75,246.06 r90 bottom (schematic designator SW4)
SW4_3 "TAC_SWITCH_4" SPDT_SMD_90º 2327.76,246.06 r90 bottom (schematic designator SW4)
SW4_4 "TAC_SWITCH_4" SPDT_SMD_90º 3358.76,246.06 r90 bottom (schematic designator SW4)
SW4_5 "TAC_SWITCH_4" SPDT_SMD_90º 4389.76,246.06 r90 bottom (schematic designator SW4)
SW4_6 "TAC_SWITCH_4" SPDT_SMD_90º 5420.77,246.06 r90 bottom (schematic designator SW4)
SW5_1 "TAC_SWITCH_4" "Header 2x1" 856.3,2396.65 r270 top (schematic designator SW5)
SW5_2 "TAC_SWITCH_4" "Header 2x1" 1887.3,2396.65 r270 top (schematic designator SW5)
SW5_3 "TAC_SWITCH_4" "Header 2x1" 2918.31,2396.65 r270 top (schematic designator SW5)
SW5_4 "TAC_SWITCH_4" "Header 2x1" 3949.31,2396.65 r270 top (schematic designator SW5)
SW5_5 "TAC_SWITCH_4" "Header 2x1" 4980.31,2396.65 r270 top (schematic designator SW5)
SW5_6 "TAC_SWITCH_4" "Header 2x1" 6011.32,2396.65 r270 top (schematic designator SW5)
U1 "LM1117" SOT223 334.64,6828.25 r90 bottom
U2 "STM32F401RB" LQFP64-10x10mm 5196.85,5563.48 r45 top value=Value
U3 "Part Number: PCM3168A" PAP64_7X7P26 25400.83,1965.61 r0 top
U4_1 "OPA4134" TSSOP-14 16663.94,10193.78 r0 top (schematic designator U4)
U4_2 "OPA4134" TSSOP-14 16623.62,11178.03 r0 top (schematic designator U4)
U4_3 "OPA4134" TSSOP-14 16480.91,12147.52 r0 top (schematic designator U4)
U5 "Opamp_x2" D8 5959.65,7522.15 r180 bottom
U6 "LT8330" S6 569.69,3089.69 r180 bottom
U7 "OPA4134" TSSOP-14 26250.89,137.11 r0 top
U8 "OPA2134" D8 4618.05,3908.96 r0 bottom
Y1 "XTAL" XTAL_HC49/US_HS 4308.56,5676.77 r90 top

## Footprints (in the part's own frame and the unit in brackets; to place one, negate y for a bottom-side part, rotate by r counter-clockwise, add the part's x,y. Pads: shape width x height; smd on the part's side, far side on the other; paste and mask are expansions set on the pad)
C0805 [mm] "Capacitor SMD 0805"
  rect 1.3x1.5 smd: 1(-0.95,0) 2(0.95,0)
  silkscreen extent -1.07,-0.95 1.07,0.95, body extent -1,-0.62 1,0.63, height 0.8
CAP_ELECTROLYTIC [mil]
  rect 140x75 smd paste+0 mask+0: 1(-137,0) 2(137,0)
  silkscreen extent -172,-172 172,172
CAP_Electrolytic [mil]
  rect 140x75 smd paste+0 mask+0: 1(-137,0) 2(137,0)
  silkscreen extent -173,-173 173,173
"Combo XLR Jack" [mil]
  round 85 hole 47: 1(724,-240) 2(724,240) 3(724,0) G(437,0) R(571,-205) S(437,205) T(984,362)
  round 0 hole 83 unplated: Mount(276,-157)
  silkscreen extent 0,-500 1276,500
D8 [mil]
  rect 86x22 smd paste+0 mask+0: 1(-93,75) 2(-93,25) 3(-93,-25) 4(-93,-75) 5(93,-75) 6(93,-25) 7(93,25) 8(93,75)
  silkscreen extent -122,-104 84,127
DPDT_SMD_SLIDE_90º [mm]
  rect 1x1.6 smd: 1(-2.5,1.2) 2(0,1.2) 3(2.5,1.2) 4(-2.5,-1.2) 5(0,-1.2) 6(2.5,-1.2)
  round 0 hole 0.9 unplated: 7(-3.4,0) 8(3.4,0)
  silkscreen extent -4.5,-1.8 4.5,1.8
DPDT_SMD_Slide_90º [mm]
  rect 1x1.6 smd: 1(-2.5,1.2) 2(0,1.2) 3(2.5,1.2) 4(-2.5,-1.2) 5(0,-1.2) 6(2.5,-1.2)
  round 0 hole 0.9 unplated: 7(-3.4,0) 8(3.4,0)
  silkscreen extent -4.5,-1.8 4.5,1.8
"Header 2x1" [mil]
  rect 60x60 hole 25: 1(0,0)
  round 60 hole 25: 2(100,0)
  silkscreen extent -50,-50 150,50
"Header 3x1" [mil]
  rect 60x60 hole 25: 1(0,0)
  round 60 hole 25: 2(100,0) 3(200,0)
  silkscreen extent -50,-50 252,50
IDC10M [mm] "10 pin IDC male header connector"
  rect 1.8x1.8 hole 1: 1(-5.08,-1.27)
  round 1.8 hole 1: 2(-5.08,1.27) 3(-2.54,-1.27) 4(-2.54,1.27) 5(0,-1.27) 6(0,1.27) 7(2.54,-1.27) 8(2.54,1.27) 9(5.08,-1.27) 10(5.08,1.27)
  silkscreen extent -10.15,-4.4 10.15,4.4, body extent -10.15,-4.4 10.15,4.7, height 9.3
"Jack 3.5mm" [mil]
  oval 30x85 hole 47 slot 16 at 0 deg: 1(79,0) 4(512,-157)
  oval 85x30 hole 16 slot 47 at 0 deg: 2(386,205) 3(330,98) 5(213,-177)
  silkscreen extent 0,-217 600,236
L0805 [mm] "Capacitor SMD 0805"
  rect 1.3x1.5 smd: 1(-0.95,0) 2(0.95,0)
  silkscreen extent -1.07,-0.95 1.07,0.95, body extent -1,-0.62 1,0.63, height 0.8
LQFP64-10x10mm [mil]
  rect 47x12 smd: 1(-226.38,147.64) 2(-226.38,127.95) 3(-226.38,108.27) 4(-226.38,88.58) 5(-226.38,68.9) 6(-226.38,49.21) 7(-226.38,29.53) 8(-226.38,9.84) 9(-226.38,-9.84) 10(-226.38,-29.53) 11(-226.38,-49.21) 12(-226.38,-68.9) 13(-226.38,-88.58) 14(-226.38,-108.27) 15(-226.38,-127.95) 16(-226.38,-147.64) 33(226.38,-147.64) 34(226.38,-127.95) 35(226.38,-108.27) 36(226.38,-88.58) 37(226.38,-68.9) 38(226.38,-49.21) 39(226.38,-29.53) 40(226.38,-9.84) 41(226.38,9.84) 42(226.38,29.53) 43(226.38,49.21) 44(226.38,68.9) 45(226.38,88.58) 46(226.38,108.27) 47(226.38,127.95) 48(226.38,147.64)
  rect 12x47 smd: 17(-147.64,-226.38) 18(-127.95,-226.38) 19(-108.27,-226.38) 20(-88.58,-226.38) 21(-68.9,-226.38) 22(-49.21,-226.38) 23(-29.53,-226.38) 24(-9.84,-226.38) 25(9.84,-226.38) 26(29.53,-226.38) 27(49.21,-226.38) 28(68.9,-226.38) 29(88.58,-226.38) 30(108.27,-226.38) 31(127.95,-226.38) 32(147.64,-226.38) 49(147.64,226.38) 50(127.95,226.38) 51(108.27,226.38) 52(88.58,226.38) 53(68.9,226.38) 54(49.21,226.38) 55(29.53,226.38) 56(9.84,226.38) 57(-9.84,226.38) 58(-29.53,226.38) 59(-49.21,226.38) 60(-68.9,226.38) 61(-88.58,226.38) 62(-108.27,226.38) 63(-127.95,226.38) 64(-147.64,226.38)
  silkscreen extent -290,-202 202,202
PAP64_7X7P26 [mm]
  rect 1.461x0.219 smd paste+0 mask+0: 1(-5.725,3.75) 2(-5.725,3.25) 3(-5.725,2.75) 4(-5.725,2.25) 5(-5.725,1.75) 6(-5.725,1.25) 7(-5.725,0.75) 8(-5.725,0.25) 9(-5.725,-0.25) 10(-5.725,-0.75) 11(-5.725,-1.25) 12(-5.725,-1.75) 13(-5.725,-2.25) 14(-5.725,-2.75) 15(-5.725,-3.25) 16(-5.725,-3.75) 33(5.725,-3.75) 34(5.725,-3.25) 35(5.725,-2.75) 36(5.725,-2.25) 37(5.725,-1.75) 38(5.725,-1.25) 39(5.725,-0.75) 40(5.725,-0.25) 41(5.725,0.25) 42(5.725,0.75) 43(5.725,1.25) 44(5.725,1.75) 45(5.725,2.25) 46(5.725,2.75) 47(5.725,3.25) 48(5.725,3.75)
  rect 0.219x1.461 smd paste+0 mask+0: 17(-3.75,-5.725) 18(-3.25,-5.725) 19(-2.75,-5.725) 20(-2.25,-5.725) 21(-1.75,-5.725) 22(-1.25,-5.725) 23(-0.75,-5.725) 24(-0.25,-5.725) 25(0.25,-5.725) 26(0.75,-5.725) 27(1.25,-5.725) 28(1.75,-5.725) 29(2.25,-5.725) 30(2.75,-5.725) 31(3.25,-5.725) 32(3.75,-5.725) 49(3.75,5.725) 50(3.25,5.725) 51(2.75,5.725) 52(2.25,5.725) 53(1.75,5.725) 54(1.25,5.725) 55(0.75,5.725) 56(0.25,5.725) 57(-0.25,5.725) 58(-0.75,5.725) 59(-1.25,5.725) 60(-1.75,5.725) 61(-2.25,5.725) 62(-2.75,5.725) 63(-3.25,5.725) 64(-3.75,5.725)
  rect 7.26x7 smd paste-3.617 mask-3.619: EPAD(0,0)
  silkscreen extent -7.93,-7.11 7.11,7.11, body extent 0,0 0.25,0.25, height 0.25
R0805 [mm] "Resistor SMD 0805"
  rect 1.3x1.5 smd: 1(-0.95,0) 2(0.95,0)
  silkscreen extent -1.07,-0.95 1.07,0.95, body extent -1,-0.63 1,0.63, height 0.43
S6 [mil]
  rect 48x20 smd paste+0 mask+0: 1(-45,37.4) 2(-45,0) 3(-45,-37.4) 4(45,-37.4) 5(45,0) 6(45,37.4)
  silkscreen extent -55,-62 40,80
SMD_0805_Diodo [mm] "Diodo SMD"
  rect 1.1x1.25 smd: 1(0,0) 2(2.5,0)
  silkscreen extent -0.38,-0.89 2.92,0.89
SOD128 [mil]
  rect 53.5x18 smd paste+0 mask+0: 1(-40.25,0) 2(40.25,0)
  silkscreen extent -142,-32 75,32, body extent -75,-30 75,30, height 20
SOT23 [mm]
  rect 1.4x1.4 smd: 1(1.1,-1.3)
  rect 1.2x1.4 smd: 2(-1.1,-1.3)
  rect 2.8x1.4 smd: 3(0,1.3)
  silkscreen extent -2.25,-2.3 2.25,2.3, body extent -1.5,-1.8 1.5,1.8, height 1.4
SOT143B [mm]
  rect 1x0.8 smd: 1(-0.75,-0.85)
  rect 0.6x0.8 smd: 2(0.95,-0.85) 3(0.95,0.85) 4(-0.95,0.85)
  silkscreen extent -1.45,-0.65 1.45,0.65
SOT223 [mm]
  rect 0.95x2.15 smd: 1(-2.3,-2.9) 2(0,-2.9) 3(2.3,-2.9)
  rect 3.75x2.15 smd: 4(0,2.9)
  silkscreen extent -3.56,-4.42 3.56,4.72, body extent -3.05,-3.17 3.05,3.68, height 1.7
SPDT_SMD_90º [mm] "TAC SWITCH de 4"
  rect 1.7x0.7 smd: 1(3.85,1.9) 2(3.85,-0.64) 3(3.85,-3.18)
  rect 1.1x1.55 smd: 4(-1.905,4.875) 5(1.905,4.875) 6(-1.905,-4.875) 7(1.905,-4.875)
  silkscreen extent -4.75,-4.25 4.2,4.25
SPST_TH_SW_Button_90º [mil]
  round 80 hole 43: 1(100,100) 2(-100,100)
  round 0 hole 43: 3(100,-100)
  round 0 hole 43 unplated: 4(-100,-100)
  silkscreen extent -160,-158 160,100
TAC_SW_4 [mm] "TAC SWITCH de 4"
  round 2 hole 1.1: 1(-3.25,-2.25) 2(-3.25,2.25) 2(3.25,2.25)
  rrect50% 2x2 hole 1.1: 1(3.25,-2.25)
  silkscreen extent -3.25,-3 3.25,3, body extent -3.87,-3.01 3.87,3.02, height 5.01
Track_8mil [mil] "Track 8 mils"
  rect 4x8 smd paste+0 mask+0: 1(-1.97,0)
  rect 4x8 smd mask+0: 2(1.97,0)
TSSOP-14 [mil]
  rect 66x14 smd paste+0 mask+0: 1(-111,76.77) 2(-111,51.18) 3(-111,25.59) 4(-111,0) 5(-111,-25.59) 6(-111,-51.18) 7(-111,-76.77) 8(111,-76.77) 9(111,-51.18) 10(111,-25.59) 11(111,0) 12(111,25.59) 13(111,51.18) 14(111,76.77)
  silkscreen extent -130,-106 94,125
"USB Type B" [mm] "Molex 67068-XX1X"
  round 1.6 hole 1: 1(1.25,2.355) 2(-1.25,2.355) 3(-1.25,0.355) 4(1.25,0.355)
  round 0 hole 1.65 slot 0.65 at 0 deg unplated: 5(-5.55,-2.355) 6(5.55,-2.355)